# EAGLE board pcb (EAGLE 6.3)
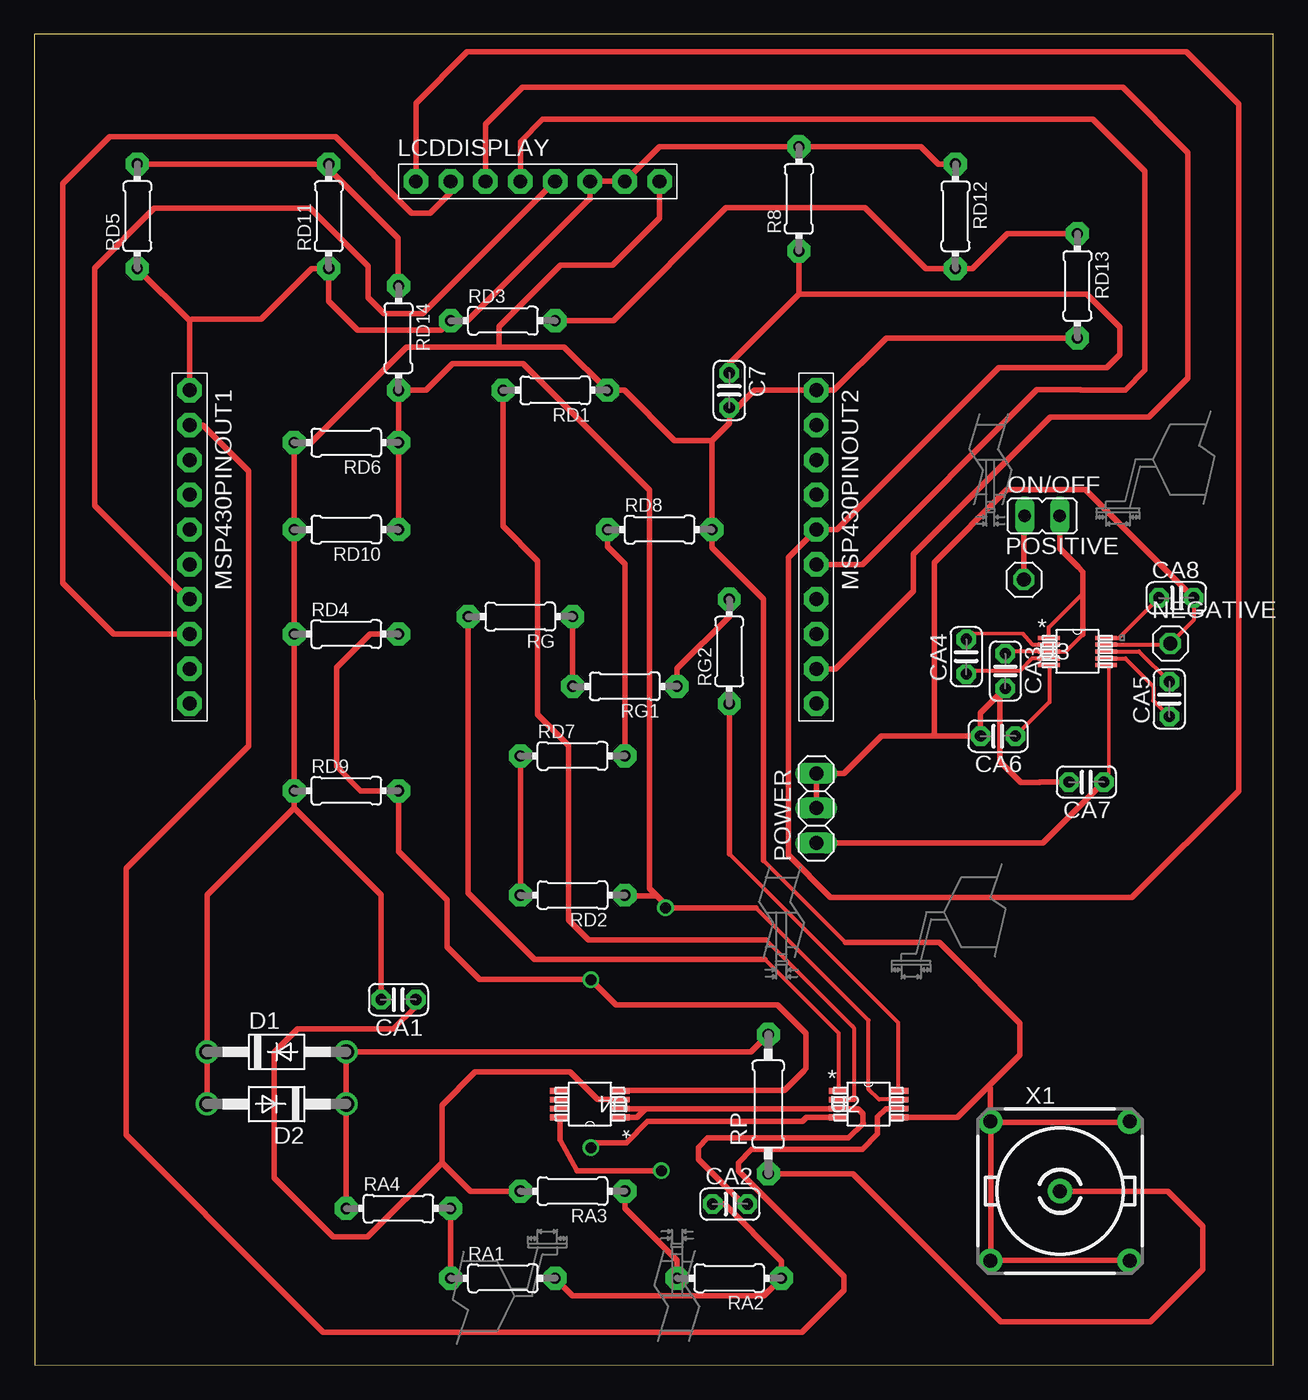
[diagram p0: board, top side]
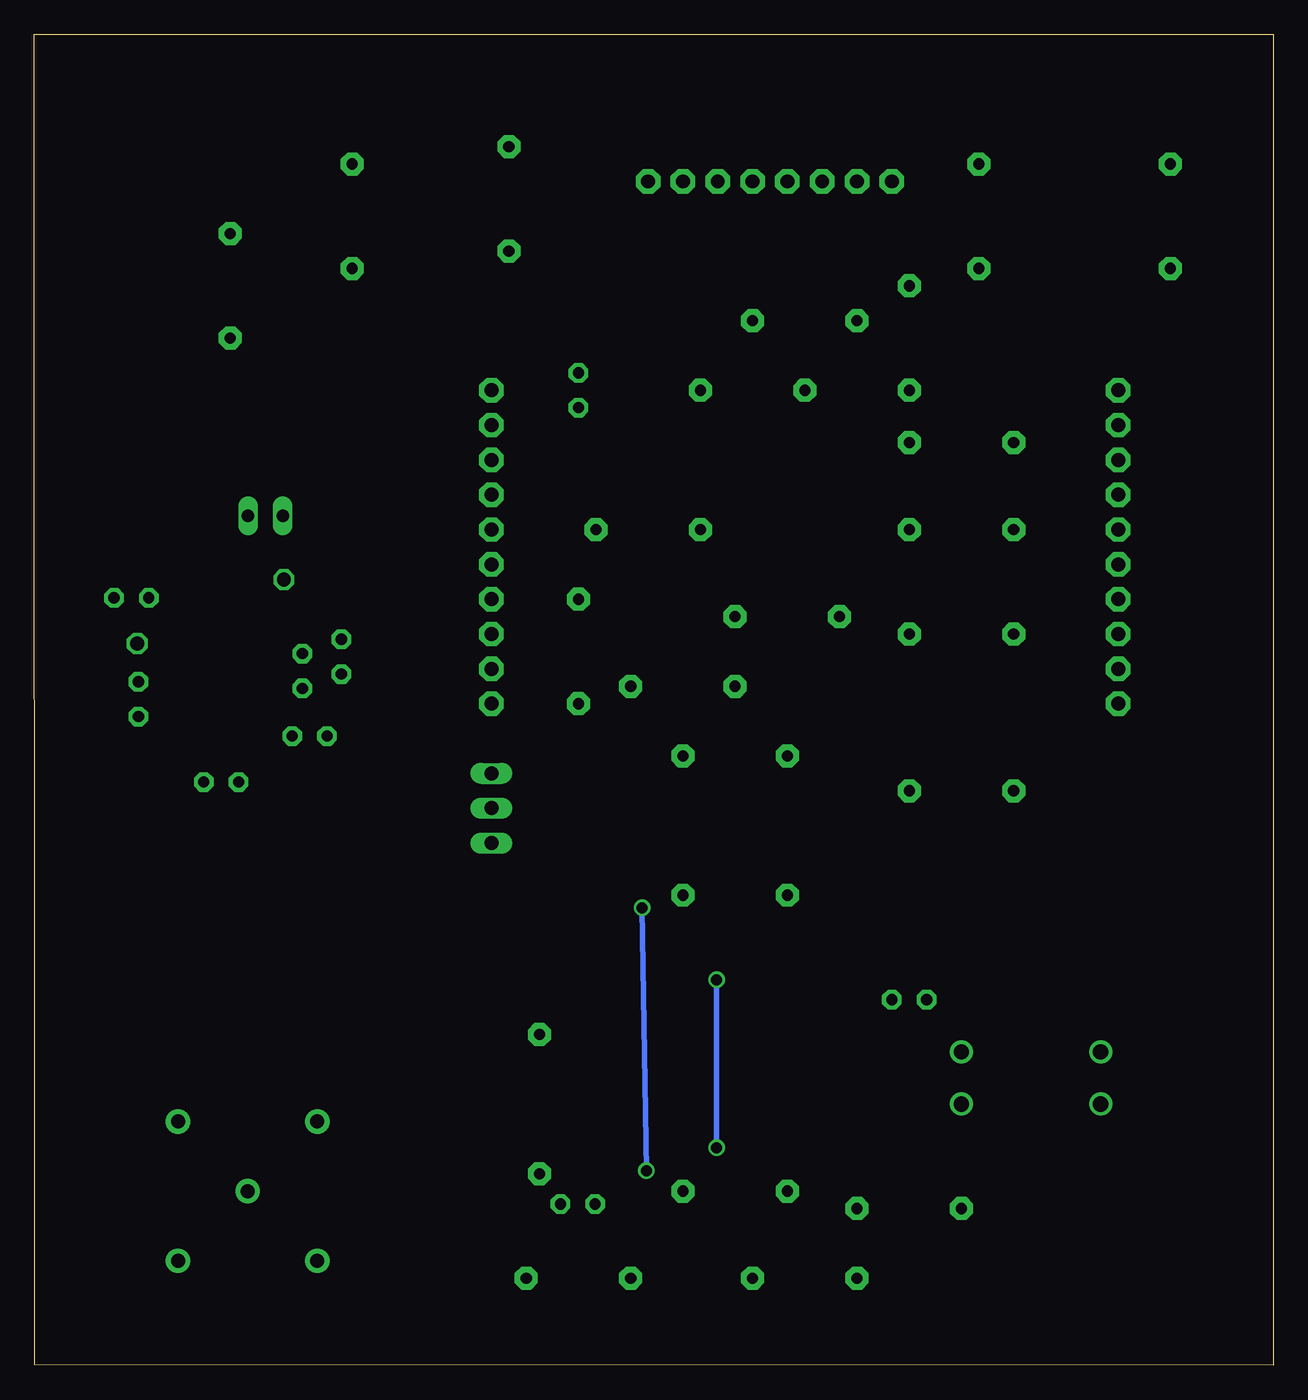
[diagram p1: board, bottom side, seen from below]

Size 90.4 x 97.09 mm. Coordinates in mm from the lower left corner, seen from the top.
Outline: 0.03,0 90.37,0.03 90.4,97.09 0,97.09 0.03,0
Copper layers (1*16): Top 0.035mm / dielectric 1.5mm / Bottom 0.035mm
Design rules "default": minimum track width 10mil, minimum drill 24mil, track to track 8mil, track to pad 8mil, pad to pad 8mil, via to via 8mil, smd to smd 8mil, copper to edge 40mil, drill to drill 8mil, minimum pad ring 10mil, minimum via ring 8mil, stop-mask expansion 4mil, vias tented up to drill 0mil, thermal gap 10mil

## Footprints (pad centres in the part's own frame; a part is rotated, then mirrored left to right if it is on the bottom)
C025-024X044 = drill 0.813 pad 1.422 octagon: 1 -1.27,0; 2 1.27,0
DO41-10 = drill 1.118: A 5.08,0; C -5.08,0
1X08-BIG = drill 1.016 pad 1.778 octagon: 1 -8.89,0; 2 -6.35,0; 3 -3.81,0; 4 -1.27,0; 5 1.27,0; 6 3.81,0; 7 6.35,0; 8 8.89,0
1X10-BIG = drill 1.016 pad 1.778 octagon: 1 -11.43,0; 2 -8.89,0; 3 -6.35,0; 4 -3.81,0; 5 -1.27,0; 6 1.27,0; 7 3.81,0; 8 6.35,0; 9 8.89,0; 10 11.43,0
1X01 = drill 1.016 octagon: 1 0,0
JP1 = drill 0.914 long: 1 0,-1.27; 2 0,1.27
1X03 = drill 1.016 long: 1 -2.54,0; 2 0,0; 3 2.54,0
0204/7 = drill 0.813 pad 1.676 octagon: 1 -3.81,0; 2 3.81,0
0207/10 = drill 0.813 pad 1.676 octagon: 1 -5.08,0; 2 5.08,0
DGK8 = smd 1.422 x 0.432: 1 -2.184,0.965; 2 -2.184,0.33; 3 -2.184,-0.33; 4 -2.184,-0.965; 5 2.184,-0.965; 6 2.184,-0.33; 7 2.184,0.33; 8 2.184,0.965
DGS10 = smd 1.575 x 0.279: 1 -2.083,0.991; 2 -2.083,0.508; 3 -2.083,0; 4 -2.083,-0.508; 5 -2.083,-0.991; 6 2.083,-0.991; 7 2.083,-0.508; 8 2.083,0; 9 2.083,0.508; 10 2.083,0.991
A1944 = drill 1.016 pad 1.778: 1 0,0; 2 5.08,5.08; 3 -5.08,5.08; 4 -5.08,-5.08; 5 5.08,-5.08

## Placement (x,y rotation side)
C7  10n  [C025-024X044]  50.7,71.12 270 top
CA1  0.01uF  [C025-024X044]  26.57,26.67 180 top
CA2  0.01uF  [C025-024X044]  50.75,11.76 0 top
CA3  1uF  [C025-024X044]  70.84,50.65 270 top
CA4  1uF  [C025-024X044]  68,51.69 90 top
CA5  1uF  [C025-024X044]  82.8,48.59 90 top
CA6  1uF  [C025-024X044]  70.31,45.9 180 top
CA7  1uF  [C025-024X044]  76.76,42.55 180 top
CA8  1uF  [C025-024X044]  83.31,55.98 0 top
D1  1N4004  [DO41-10]  17.68,22.86 0 top
D2  1N4004  [DO41-10]  17.68,19.05 180 top
LCDDISPLAY  [1X08-BIG]  36.73,86.36 0 top
MSP430PINOUT1  PINHD-1X10  [1X10-BIG]  11.33,59.69 270 top
MSP430PINOUT2  PINHD-1X10  [1X10-BIG]  57.05,59.69 270 top
NEGATIVE  [1X01]  82.88,52.65 0 top
ON/OFF  [JP1]  73.53,61.95 270 top
POSITIVE  [1X01]  72.19,57.3 0 top
POWER  [1X03]  57.05,40.64 90 top
R8  47k  [0204/7]  55.78,85.09 90 top
RA1  1k  [0204/7]  34.19,6.35 0 top
RA2  1k  [0204/7]  50.7,6.35 180 top
RA3  1k  [0204/7]  39.27,12.7 180 top
RA4  1k  [0204/7]  26.57,11.43 0 top
RD1  1k  [0204/7]  38,71.12 180 top
RD2  100k  [0204/7]  39.27,34.29 180 top
RD3  16k  [0204/7]  34.19,76.2 0 top
RD4  50k  [0204/7]  22.76,53.34 0 top
RD5  12k  [0204/7]  7.52,83.82 90 top
RD6  100k  [0204/7]  22.76,67.31 180 top
RD7  100k  [0204/7]  39.27,44.45 0 top
RD8  50k  [0204/7]  45.62,60.96 0 top
RD9  50k  [0204/7]  22.76,41.91 0 top
RD10  100k  [0204/7]  22.76,60.96 180 top
RD11  12k  [0204/7]  21.49,83.82 90 top
RD12  16k  [0204/7]  67.21,83.82 270 top
RD13  10k  [0204/7]  76.1,78.74 270 top
RD14  10k  [0204/7]  26.57,74.93 270 top
RG  330  [0204/7]  35.46,54.61 180 top
RG1  470  [0204/7]  43.08,49.53 180 top
RG2  10  [0204/7]  50.7,52.07 90 top
RP  1k  [0207/10]  53.54,19.05 90 top
U2  INA333_DGK_8  [DGK8]  60.86,19.05 0 top
U3  TPS60310_DGS_10  [DGS10]  76.1,52.07 0 top
U4  OPA2314_DGK_8  [DGK8]  40.54,19.05 180 top
X1  A1944-50  [A1944]  74.83,12.7 0 top

## Library data of the parts
C7 CA1-CA8 LCDDISPLAY MSP430PINOUT1 MSP430PINOUT2 R8 RA1-RA4 RD1-RD14 RG RG1 RG2 RP = adafruit
D1 D2 = diode
NEGATIVE POSITIVE POWER = pinhead
ON/OFF = jumper
U2 = TI-INA333; DATASHEETURL: http://www.ti.com/lit/gpn/INA333; DESCRIPTION: Low Power, Precision Instrumentation Amplifier; FAMILY_NAME: SINGLE SUPPLY; GENERIC_PART_NUMBER: INA333; INDUSTRY_STD_PKG_TYPE: MSOP; MANUFACTURER: Texas Instruments; MANUFACTURER_PART_NUMBER: ina333_dgk_8; PACKAGE_DESIGNATOR: DGK; PIN_COUNT: 8; VENDOR: Texas Instruments
U3 = TI-TPS60310; DATASHEETURL: http://www.ti.com/lit/gpn/TPS60310; DESCRIPTION: Single-Cell to 3.3-V, 20-mA Ultra-Low Quiescent Current Charge Pump; FAMILY_NAME: STEP-UP CHARGE PUMP REGULATOR; GENERIC_PART_NUMBER: TPS60310; INDUSTRY_STD_PKG_TYPE: MSOP; MANUFACTURER: Texas Instruments; MANUFACTURER_PART_NUMBER: tps60310_dgs_10; PACKAGE_DESIGNATOR: DGS; PIN_COUNT: 10; VENDOR: Texas Instruments
U4 = TI-OPA2314; DATASHEETURL: http://www.ti.com/lit/gpn/OPA2314; DESCRIPTION: Dual, 3MHz, Low-Power, Low-Noise, RRI/O, 1.8V CMOS Operational Amplifier; FAMILY_NAME: LOW NOISE; GENERIC_PART_NUMBER: OPA2314; INDUSTRY_STD_PKG_TYPE: MSOP; MANUFACTURER: Texas Instruments; MANUFACTURER_PART_NUMBER: opa2314_dgk_8; PACKAGE_DESIGNATOR: DGK; PIN_COUNT: 8; VENDOR: Texas Instruments
X1 = con-coax; OC_FARNELL: unknown; OC_NEWARK: unknown

## Nets
ADCIN: MSP430PINOUT1.2 U2.6
CS(SCE): LCDDISPLAY.2 MSP430PINOUT1.8
DC: LCDDISPLAY.3 MSP430PINOUT2.9
DNMOSI: LCDDISPLAY.4 MSP430PINOUT2.6
GND: C7.2 CA1.2 D1.C D2.A LCDDISPLAY.8 MSP430PINOUT2.1 RD1.1 RD4.1 RD6.2 RD8.2 RD9.1 RD10.2 RD13.2 U2.5 X1.2 X1.3 X1.4 X1.5
N$1: CA3.1 ON/OFF.2 U3.1 U3.3
N$2: RG1.2 RG.1
N$3: RG1.1 RG2.2
N$4: CA2.2 U2.3 U4.1 U4.2
N$5: D1.A D2.C RA4.1 RP.2
N$6: CA6.1 U3.5
N$7: RP.1 X1.1
N$8: CA2.1 RA1.2 RA2.1
N$9: RG2.1 U2.8
N$10: CA3.2 CA6.2 CA7.2 CA8.2 NEGATIVE.1 POWER.2 POWER.3 U3.9
N$11: CA4.1 U3.4
N$12: CA4.2 U3.2
N$13: RA1.1 RA4.2
N$14: CA5.1 U3.7
N$15: CA5.2 U3.8
N$16: ON/OFF.1 POSITIVE.1
N$17: RA2.2 RA3.1
N$18: CA1.1 RA3.2 U4.3
N$19: CA7.1 POWER.1 U3.6
N$20: CA8.1 U3.10
N$21: RG.2 U2.1
N$22: RD2.2 RD7.1
N$23: RD7.2 RD8.1
N$24: RD5.2 RD11.2 RD14.1
N$25: RD3.2 RD12.2 RD13.1
RST: C7.1 LCDDISPLAY.1 MSP430PINOUT2.5 R8.1
SCK: LCDDISPLAY.5 MSP430PINOUT1.7
VD: RD2.1 RD6.1 RD10.1 RD14.2 U2.7 U4.8
VDD: LCDDISPLAY.6 LCDDISPLAY.7 MSP430PINOUT1.1 R8.2 RD3.1 RD5.1 RD11.1 RD12.1
VND: RD4.2 RD9.2 U2.4 U4.4
VZ: RD1.2 U2.2

## Tracks (layer width: path | path; a pad name or v marks a point on that pad's centre or on a via)
ADCIN
  Top 0.406: MSP430PINOUT1.2 12.29,68.58 15.65,65.23 15.65,47.94 15.65,45.19 14.21,43.75 6.71,36.25 6.71,16.79 18.31,5.18 21.09,2.4 55.74,2.4 56,2.4 59.05,5.46 59.05,6.5 51.36,14.2 51.36,14.78 52.32,15.75 60.4,15.75 61.52,16.87 61.52,18.11 62.13,18.72 U2.6
CS(SCE)
  Top 0.406: LCDDISPLAY.2 30.38,85.55 28.88,84.05 27.53,84.05 21.97,89.61 5.49,89.61 2.08,86.21 2.08,57.05 5.77,53.37 5.79,53.34 MSP430PINOUT1.8
DC
  Top 0.406: MSP430PINOUT2.9 58.45,50.8 64.13,56.49 64.13,59.18 74.12,69.16 76,69.16 81.31,69.16 84.15,72.01 84.15,88.47 79.4,93.22 35.61,93.22 32.92,90.53 LCDDISPLAY.3
DNMOSI
  Top 0.406: MSP430PINOUT2.6 60.4,58.42 73.15,71.17 76.32,71.17 76.34,71.14 79.58,71.14 81.03,72.59 81.03,87.1 77.24,90.88 37.08,90.88 35.46,89.26 LCDDISPLAY.4
GND
  Top 0.305: 53.19,36.83 59.18,30.84
  Top 0.406: 33.91,74.28 27.16,74.28 20.19,67.31 RD6.2 RD10.2 RD4.1 RD9.1 18.95,40.66 | 18.95,40.66 25.3,34.31 CA1.2 | D2.A D1.C 12.6,34.31 18.95,40.66 | 49.43,67.46 46.71,67.46 43.05,71.12 42.22,71.12 RD1.1 38.65,74.28 33.91,74.28 | 50.7,69.29 52.53,71.12 MSP430PINOUT2.1 58.34,71.12 62.15,74.93 RD13.2 | 50.7,69.29 50.7,68.73 49.43,67.46 | C7.2 50.7,69.29 | 49.43,67.46 RD8.2 49.43,59.64 53.19,55.88 53.19,36.83 | 69.8,17.73 X1.3 69.75,20.21 69.61,20.36 69.41,20.16 | 69.8,7.67 69.8,17.73 | 69.8,17.73 79.86,17.73 X1.2 | 69.8,7.67 X1.4 | X1.5 79.86,7.67 69.8,7.67 | U2.5 67.34,18.09 69.41,20.16 | LCDDISPLAY.8 45.62,83.67 42.19,80.24 38.38,80.24 33.91,75.77 33.91,74.28 | 59.18,30.84 66.01,30.84 71.91,24.94 71.91,22.66 69.41,20.16
N$1
  Top 0.305: 70.99,52.07 U3.3 75.26,52.07 76.5,53.31 | U3.1 74.02,53.82 76.5,56.31
  Top 0.406: ON/OFF.2 74.8,60.02 74.8,59.56 76.15,58.22 76.5,57.86 76.5,56.31 76.5,53.31 | 70.99,52.07 CA3.1
N$2
  Top 0.406: RG.1 RG1.2
N$3
  Top 0.406: RG2.2 50.7,54.63 46.89,50.83 RG1.1
N$4
  Top 0.406: U4.2 44.22,18.72 44.6,18.72 | 44.6,18.72 U2.3 60.07,18.72 60.45,18.34 60.45,17.68 60.48,17.65 59.41,16.59 49.12,16.59 48.44,15.9 48.44,15.01 51.69,11.76 CA2.2 | U4.1 43.97,18.09 44.6,18.72
N$5
  Top 0.406: RA4.1 D2.C D1.A 52.27,22.86 RP.2
N$6
  Top 0.279: 74.06,51.02 74.06,51.03 U3.5
  Top 0.305: 74.06,51.02 74.06,49.5 74.06,48.38 CA6.1
N$7
  Top 0.406: RP.1 59.72,13.97 70.51,3.17 81.43,3.17 85.24,6.99 85.24,10.13 82.7,12.68 74.85,12.68 X1.1
N$8
  Top 0.406: CA2.1 50.34,11.76 54.51,7.59 RA2.1 53.24,5.08 51.99,5.08 40.51,5.08 39.27,5.08 RA1.2
N$9
  Top 0.305: 50.7,37.31 63.02,24.99 63.02,20.04
  Top 0.406: RG2.1 50.7,37.31 | 63.02,20.04 U2.8
N$10
  Top 0.254: 82.8,52.58 NEGATIVE.1
  Top 0.305: CA8.2 84.58,54.36 NEGATIVE.1 | U3.9 82.8,52.58
  Top 0.406: CA7.2 73.34,42.55 73.32,42.52 71.98,42.52 70.46,44.04 70.46,49 | 65.51,45.9 61.8,45.9 59.08,43.18 POWER.3 POWER.2 | 65.51,45.9 66.85,45.9 67.92,45.9 CA6.2 | CA6.2 69.04,47.02 | 70.46,49 CA3.2 70.46,49 | CA6.2 69.04,47.57 70.46,49 | CA8.2 76.68,63.88 75.8,63.88 71.73,63.88 70.97,63.88 65.66,58.57 65.66,46.05 65.51,45.9
N$11
  Top 0.279: 72.82,51.58 72.87,51.58 72.89,51.56
  Top 0.305: U3.4 72.89,51.56 | 72.82,51.58 71.89,50.65 68.22,50.65 CA4.1
N$12
  Top 0.254: 73.94,52.55 U3.2 | 72.11,53.37 68.4,53.37
  Top 0.305: 72.11,53.37 72.8,52.58 U3.2
  Top 0.406: 68.4,53.37 CA4.2
N$13
  Top 0.406: RA4.2 RA1.1
N$14
  Top 0.305: CA5.1 81.64,48.49 81.64,49.53 79.6,51.56 U3.7
N$15
  Top 0.305: U3.8 80.59,52.07 CA5.2
N$16
  Top 0.406: POSITIVE.1 72.19,61.87 ON/OFF.1
N$17
  Top 0.406: RA3.1 43.08,11.46 46.89,7.64 RA2.2
N$18
  Top 0.406: RA3.2 31.83,12.7 29.74,14.78 | U4.3 41.1,19.38 39.09,21.39 32.16,21.39 29.74,18.97 29.74,14.78 | CA1.1 27.84,26.19 26.19,24.54 19.2,24.54 17.5,22.84 17.5,13.66 21.79,9.37 24.33,9.37 29.74,14.78
N$19
  Top 0.254: 78.39,51.02 78.39,43.81 78.39,42.91
  Top 0.279: 78.39,51.02 78.33,51.08 U3.6
  Top 0.406: POWER.1 73.58,38.1 CA7.1 78.39,42.91
N$20
  Top 0.305: U3.10 79.12,53.06 CA8.1
N$21
  Top 0.305: U2.1 58.67,24.23 53.31,29.59
  Top 0.406: RG.2 31.65,34.44 36.5,29.59 53.31,29.59
N$22
  Top 0.406: RD7.1 RD2.2
N$23
  Top 0.406: RD8.1 41.81,59.72 43.08,58.45 RD7.2
N$24
  Top 0.406: RD5.2 RD11.2 21.49,87.27 26.54,82.22 26.54,78.77 RD14.1
N$25
  Top 0.406: RD3.2 39.24,76.2 42.24,76.2 50.47,84.43 60.6,84.43 65.05,79.98 67.18,79.98 RD12.2 67.83,80.01 68.45,80.01 70.99,82.55 RD13.1
RST
  Top 0.406: 55.78,78.14 74.7,78.14 76.36,78.14 76.8,78.14 79.2,75.74 79.2,73.74 78.23,72.77 70.36,72.77 60.73,63.14 58.55,60.96 57.54,60.96 MSP430PINOUT2.5 55.01,58.92 55.01,37.54 55.01,37.22 58.09,34.14 80.09,34.14 87.86,41.91 87.86,45.03 87.86,83.11 87.86,92 84.05,95.81 31.57,95.81 27.84,92.08 LCDDISPLAY.1 | 55.78,78.14 55.78,80.03 R8.1 | C7.1 50.7,73.06 55.78,78.14
SCK
  Top 0.406: MSP430PINOUT1.7 11.23,55.88 4.39,62.71 4.39,80.03 8.76,84.4 20.14,84.4 24.36,80.19 24.36,77.88 25.53,76.71 28.35,76.71 LCDDISPLAY.5
VD  (via drill 0.8)
  Top 0.305: U2.7 61.62,19.38 60.86,20.14 60.86,25.17 54.74,31.29 52.65,33.38
  Top 0.406: RD10.1 RD6.1 RD14.2 28.57,71.12 30.51,73.05 35.66,73.05 44.88,63.83 44.88,34.77 45.62,34.04 | U4.8 38.35,16.43 39.6,14.2 44.81,14.2 v45.75,14.2 | RD2.1 43.13,34.24 45.42,34.24 45.62,34.04 | 45.62,34.04 46.05,33.6 v46.05,33.38 52.65,33.38
  Bottom 0.406: v45.75,14.2 v46.05,33.38
VDD
  Top 0.406: RD12.1 65.96,87.63 64.69,88.9 R8.2 54.53,88.9 45.62,88.9 LCDDISPLAY.7 LCDDISPLAY.6 40.54,85.06 40.49,85.06 31.62,76.2 RD3.1 29.69,75.51 23.6,75.51 21.49,77.62 RD11.1 20.24,80.01 16.54,76.3 11.51,76.3 11.33,76.2 | 11.33,76.2 MSP430PINOUT1.1 | 11.33,76.2 RD5.1
VND  (via drill 0.8)
  Top 0.406: U4.4 42.75,20.04 54.31,20.04 54.71,20.04 56.13,21.46 56.31,21.64 56.31,24.08 56.31,24.21 54.23,26.29 42.44,26.29 40.98,27.75 | U2.4 56.34,18.09 56.03,17.78 44.75,17.78 43.21,16.23 42.75,16.23 40.97,16.23 v40.61,15.88 | RD4.2 24.49,53.34 22.05,50.9 22.05,43.66 23.8,41.91 RD9.2 26.57,37.47 30.1,33.93 30.1,30.53 32.49,28.14 40.59,28.14 40.98,27.75 | 40.98,27.75 v40.61,28.12
  Bottom 0.406: v40.61,28.12 40.61,16.74 v40.61,15.88
VZ
  Top 0.305: 59.79,19.38 59.79,24.62 59.69,24.72 53.37,31.04
  Top 0.406: U2.2 59.79,19.38 | RD1.2 34.19,61.21 36.73,58.67 36.73,48.31 36.73,47.47 38.99,45.21 38.99,34.01 38.99,32.49 40.44,31.04 53.37,31.04